# Altium PCB GND_REVB.PcbDoc
Units mm, origin at the board's own origin, x right, y up, seen from the top; angles counter-clockwise.
Board outline 37 x 43 mm, 4 copper layers (Top Layer, GND_1, GND_2, Bottom Layer), stack 1.591 mm thick; 25 components, 30 nets, 146 pads, 61 vias.
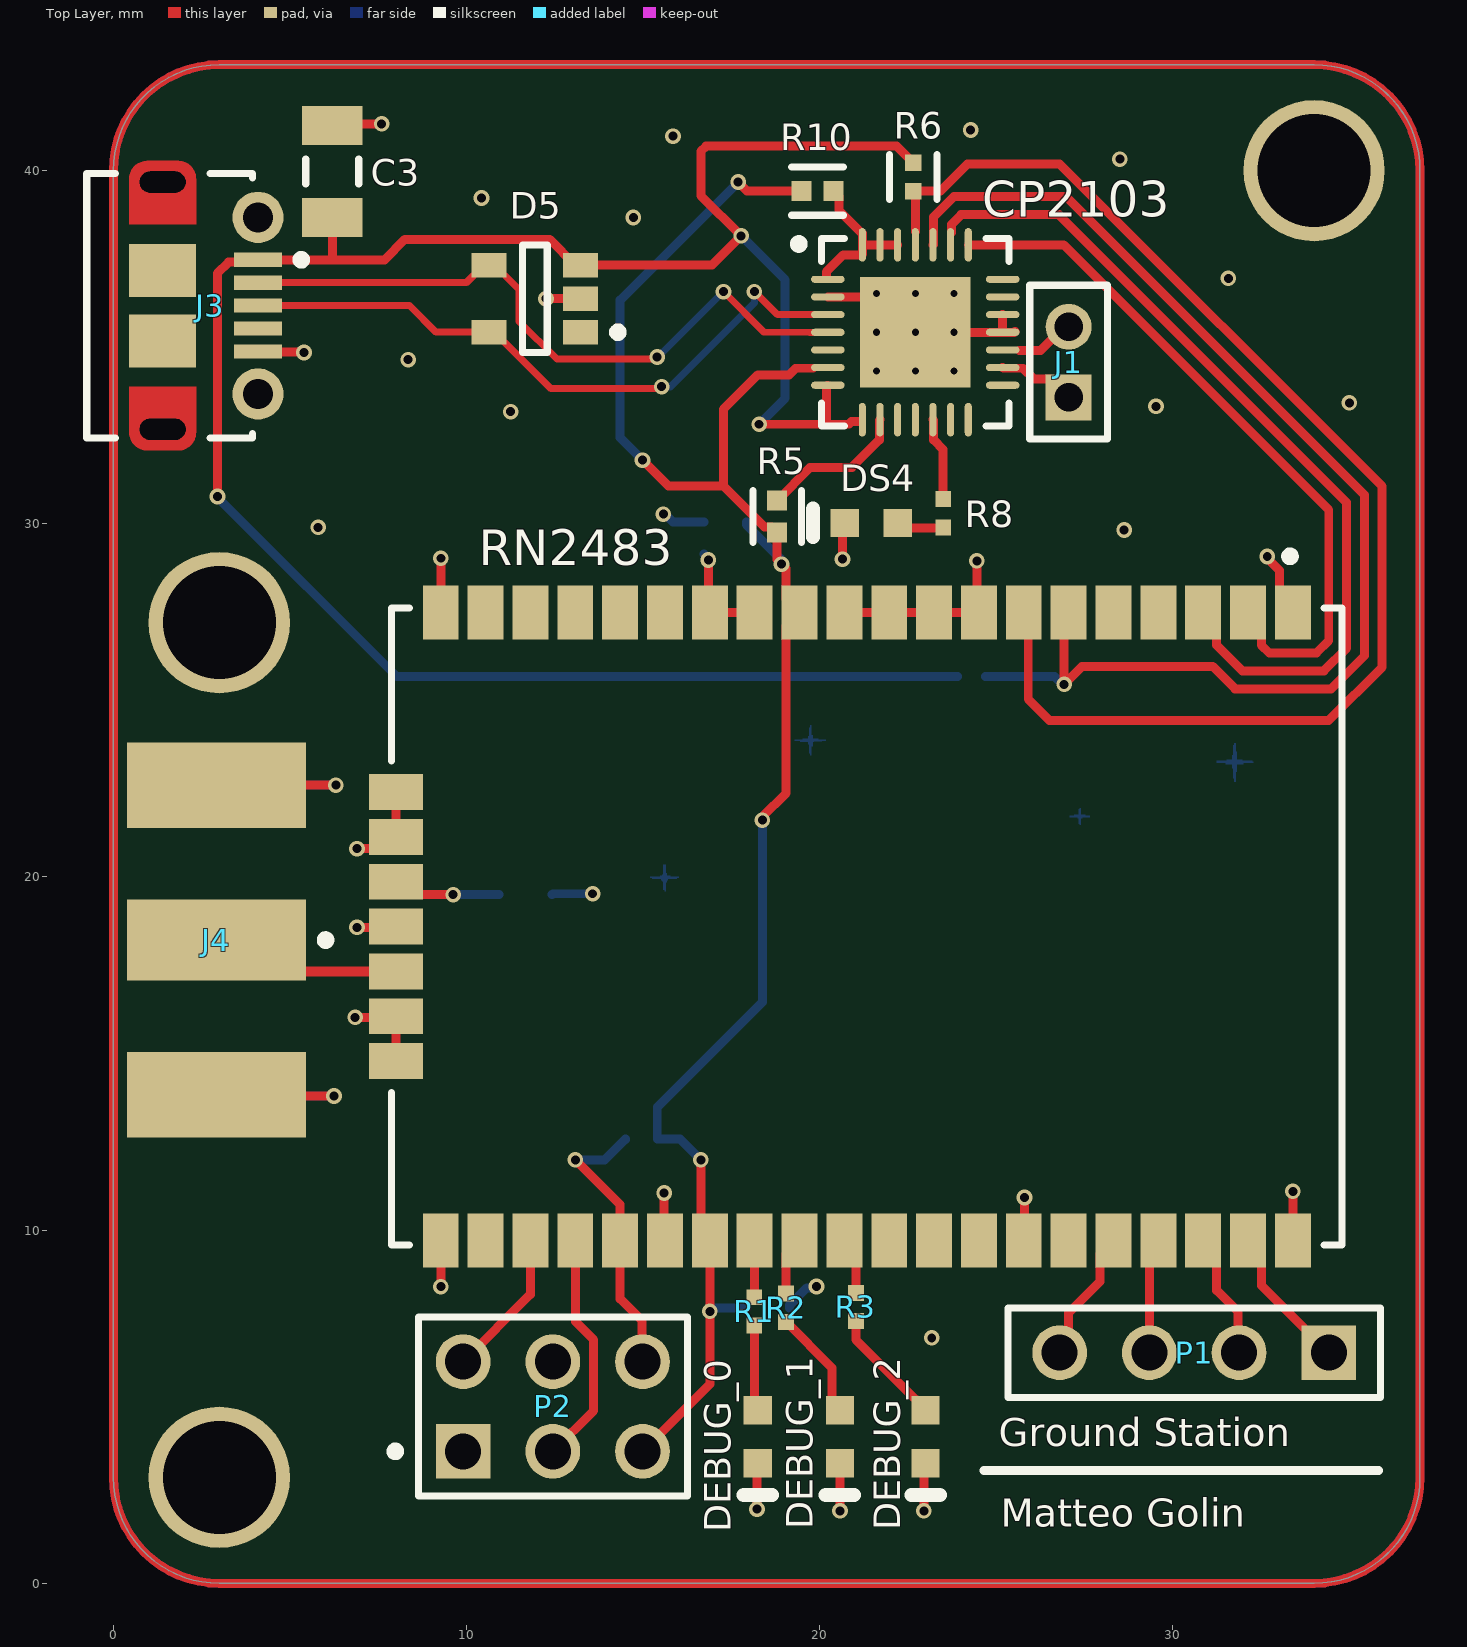
[diagram p0: Top Layer view]
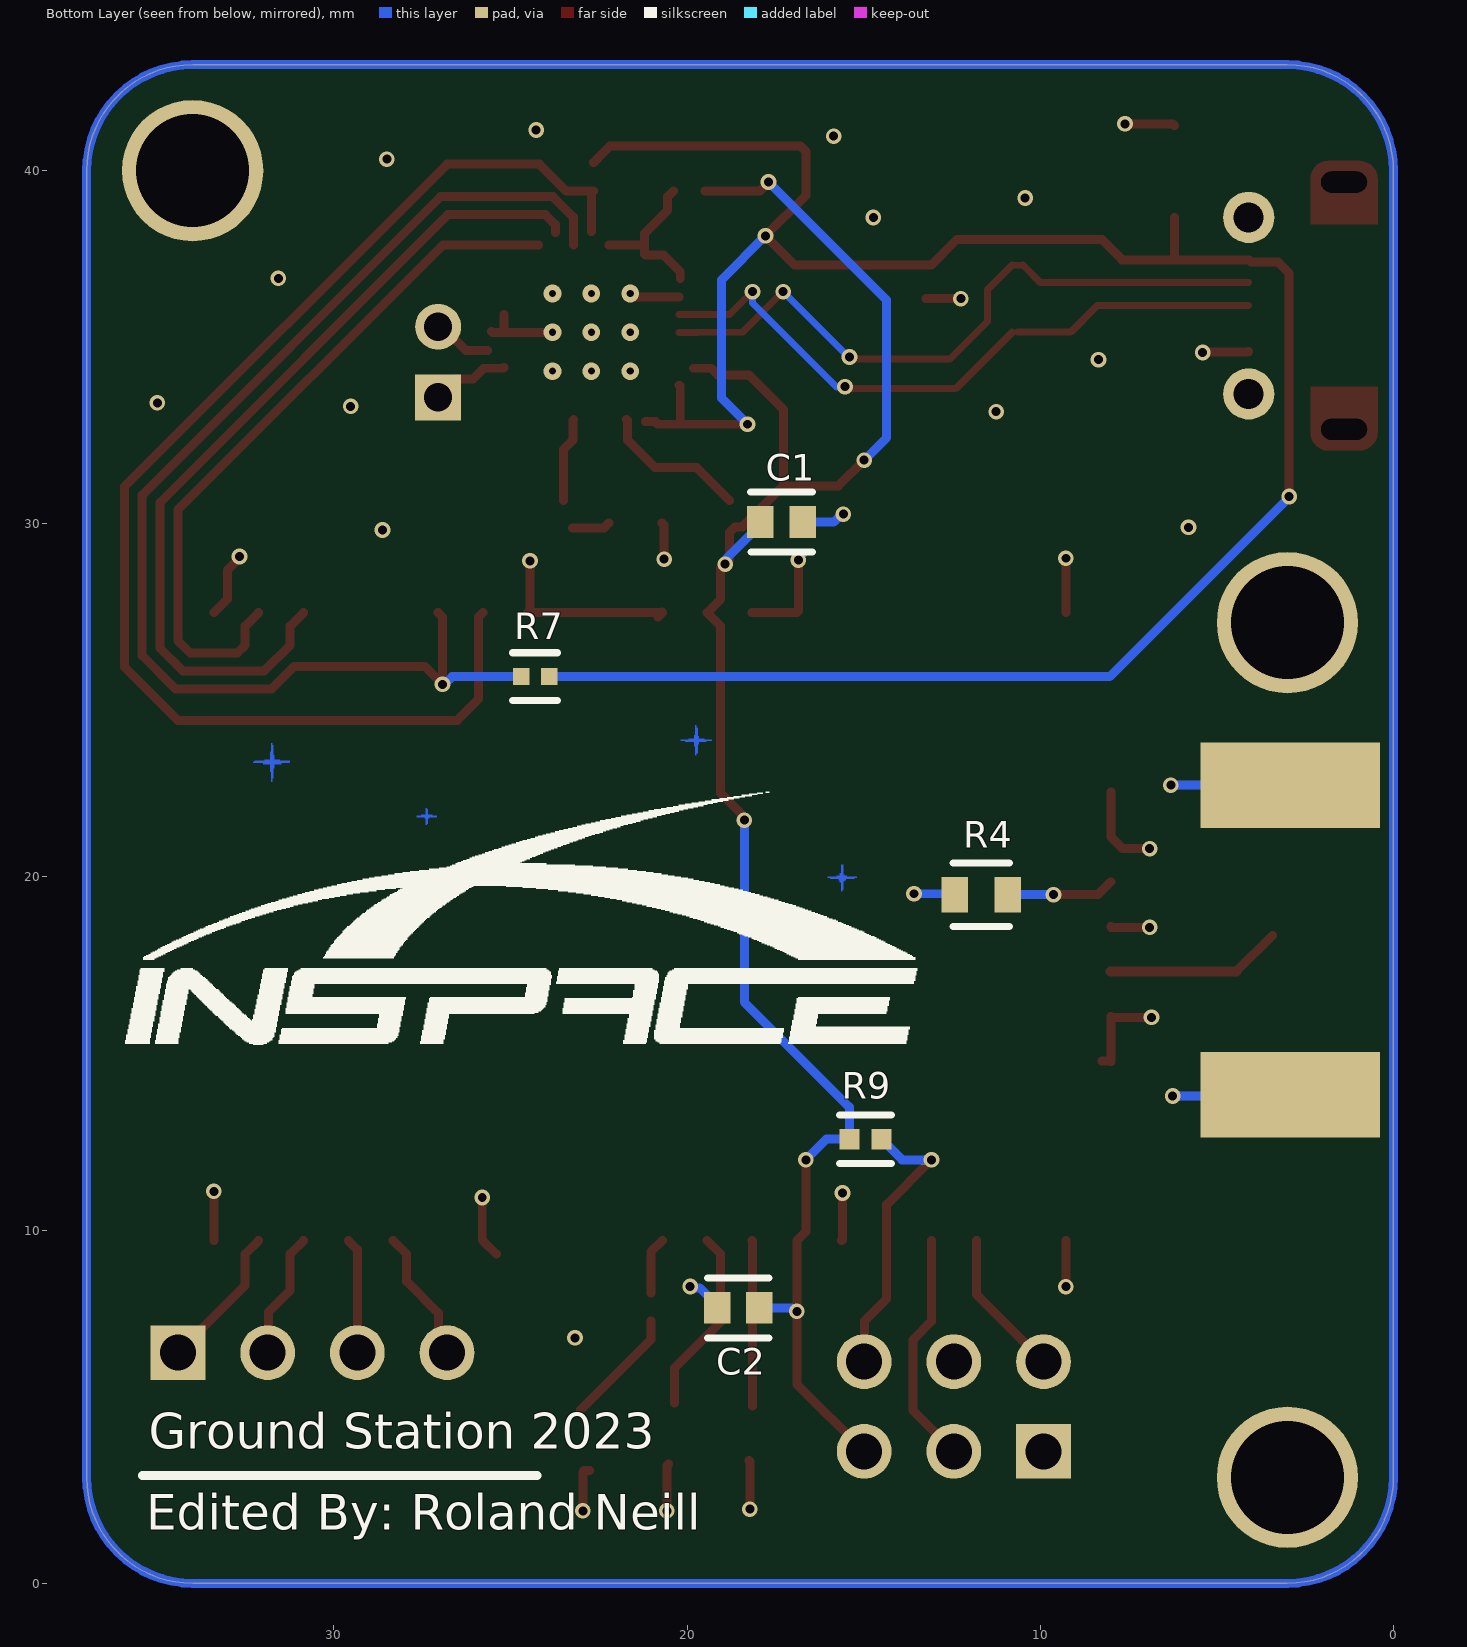
[diagram p1: Bottom Layer view, seen from below]
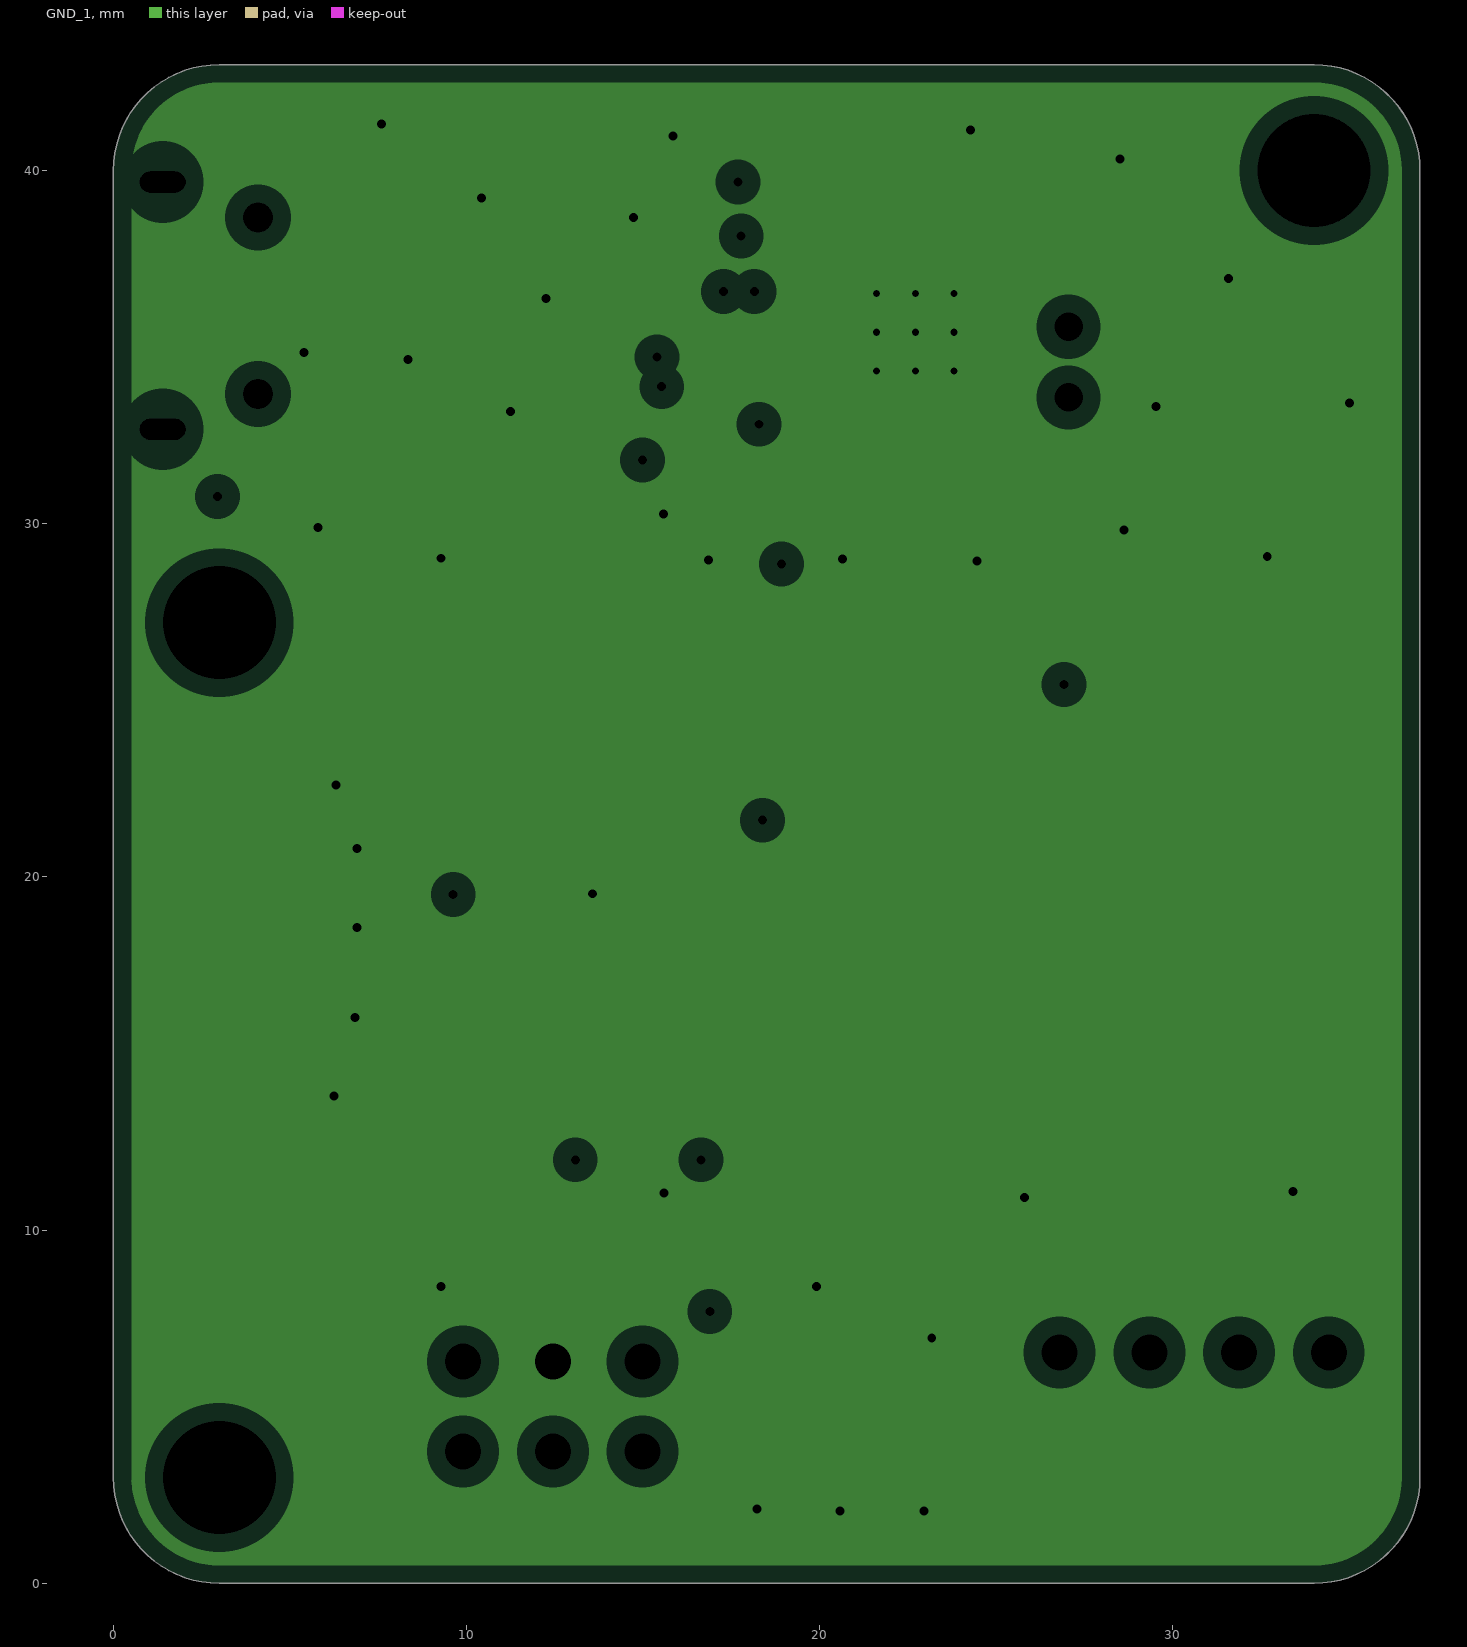
[diagram p2: GND_1, clearances drawn from the general rule]
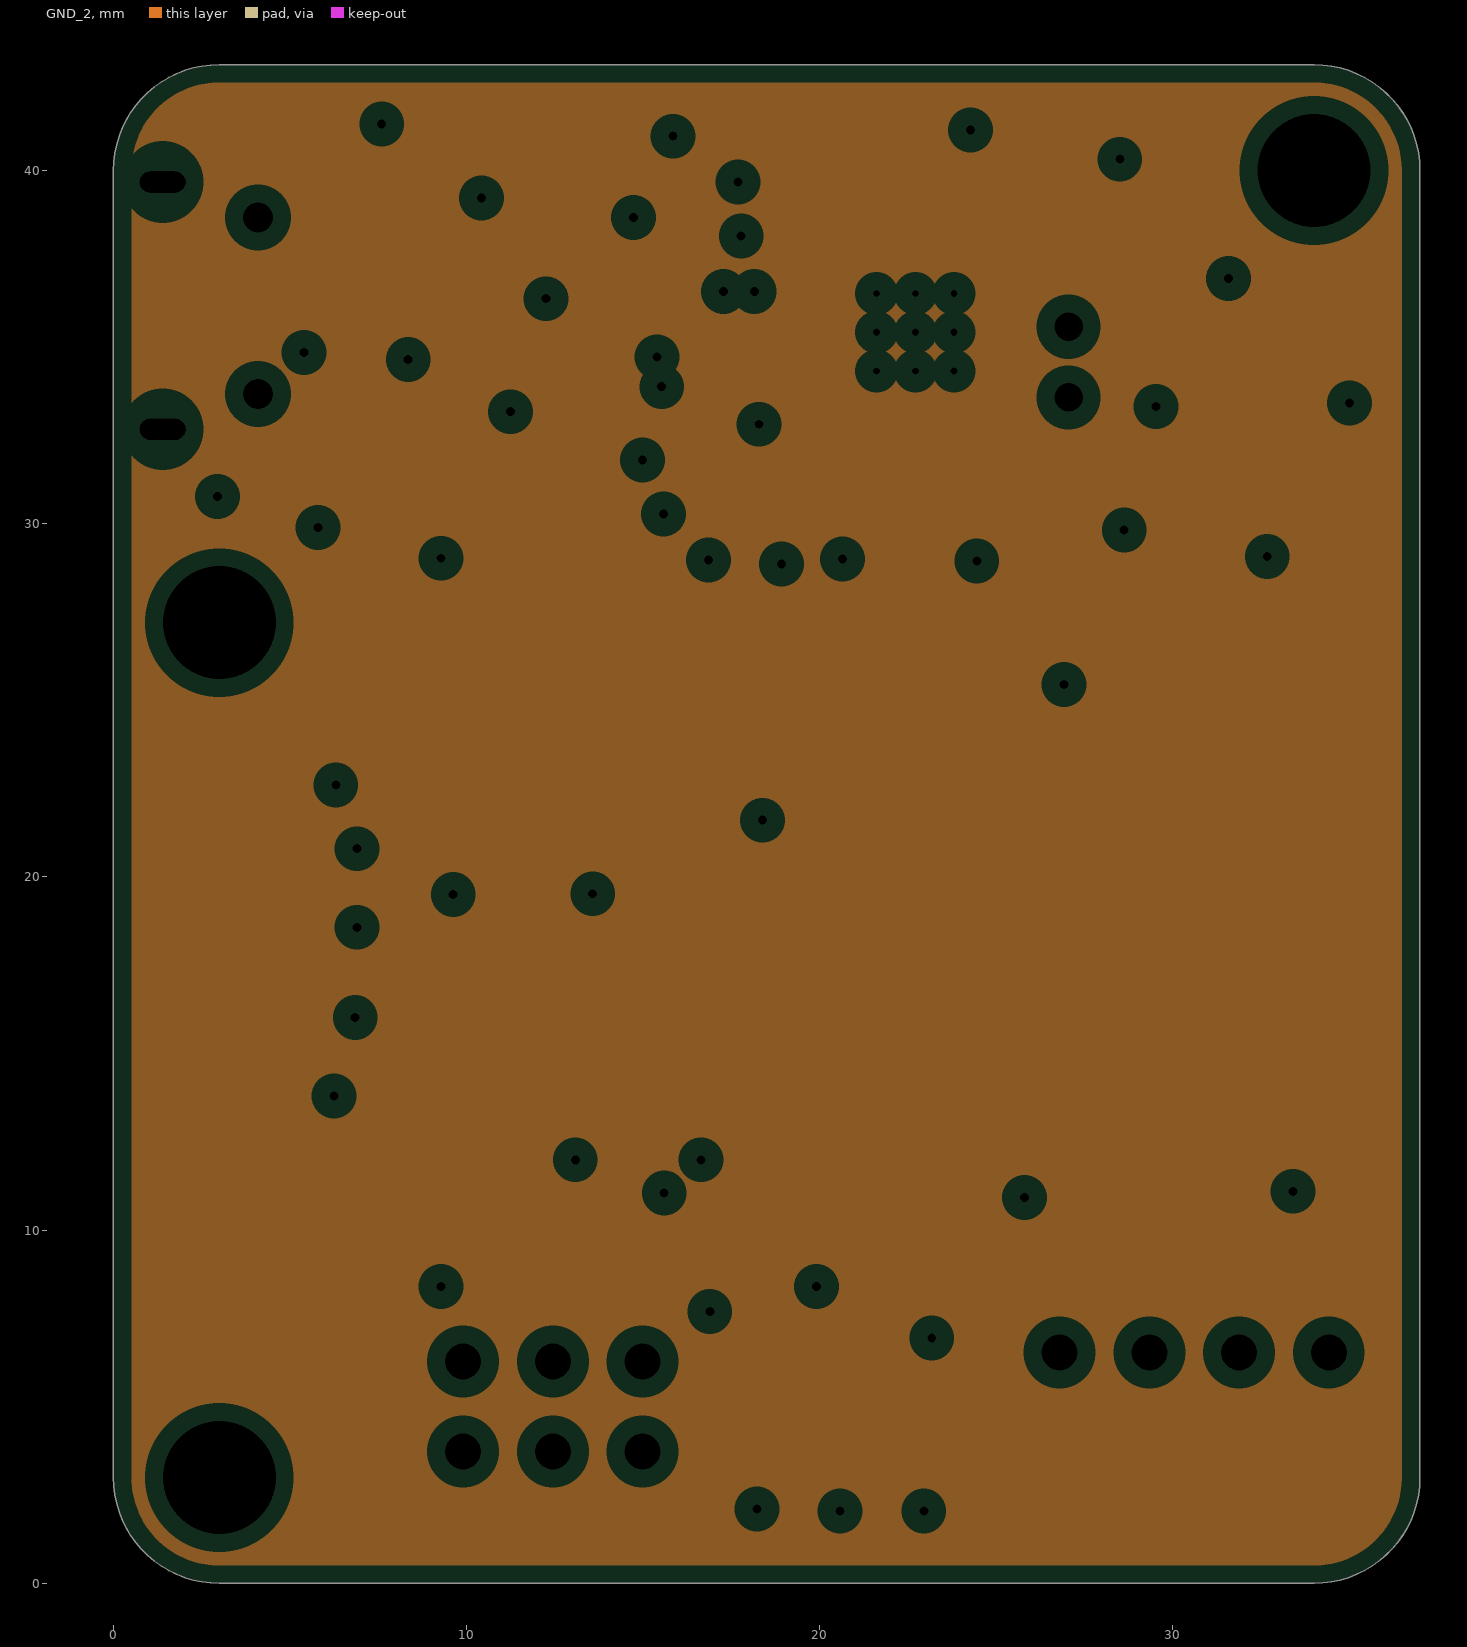
[diagram p3: GND_2, clearances drawn from the general rule]
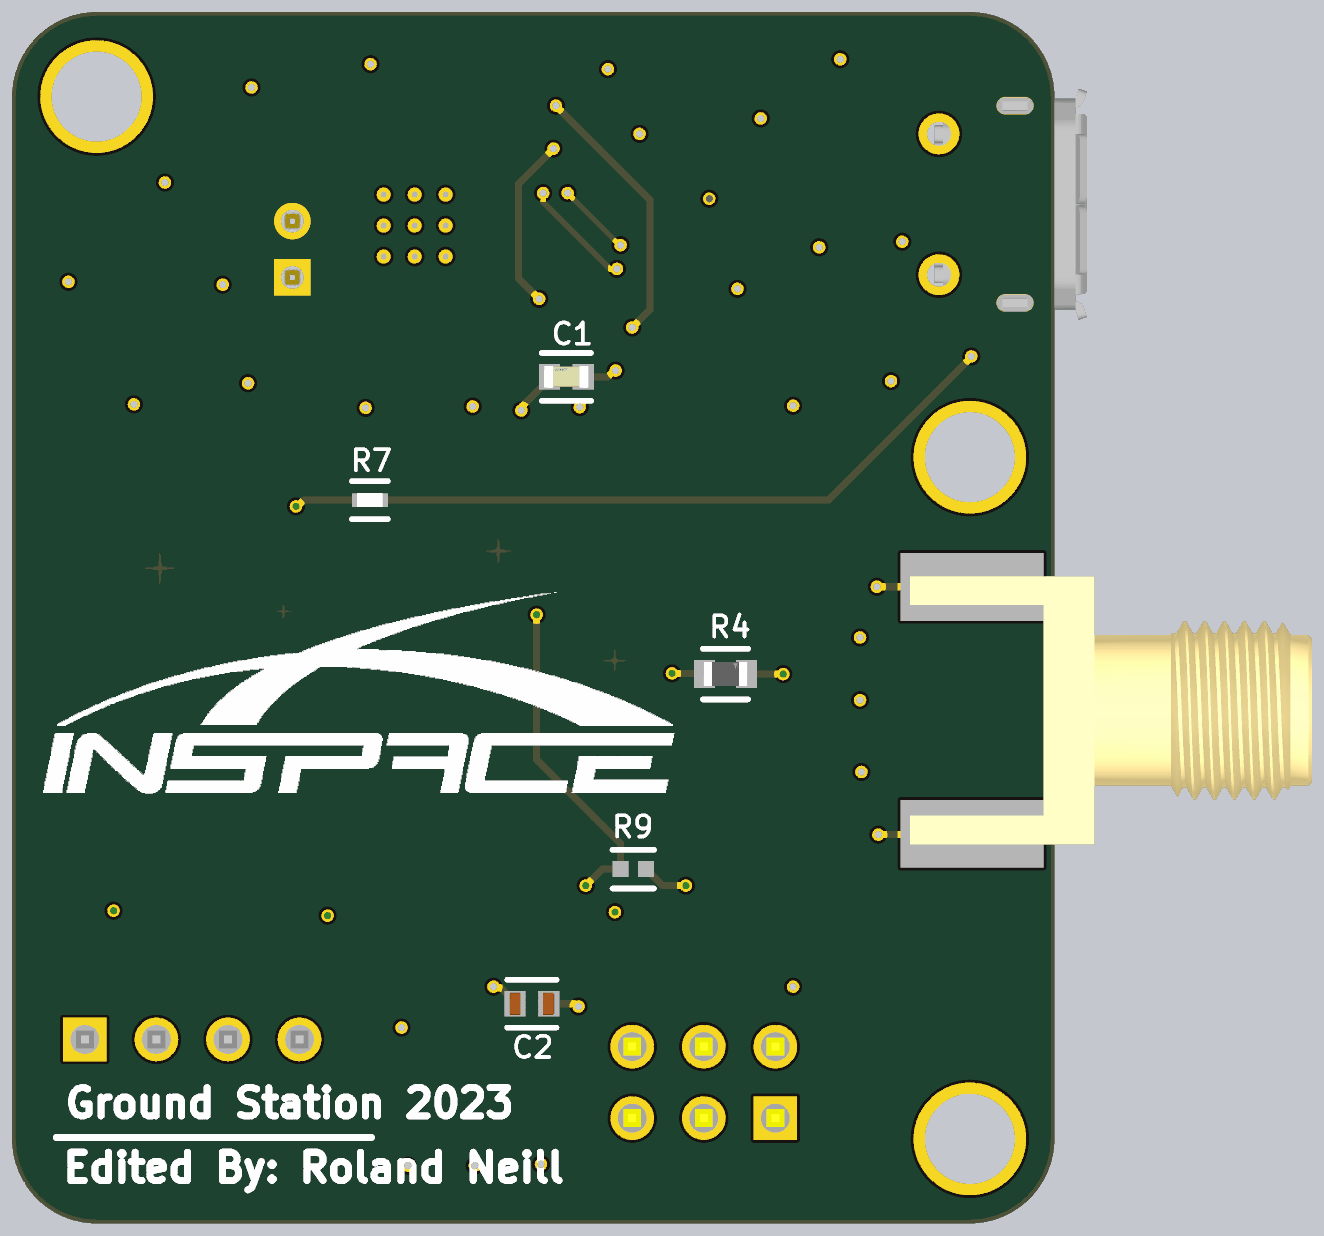
[diagram p4: 3D render of the assembled board from below, using the file's embedded part models]

## Layer stack, top to bottom
Top Solder: solder mask 0.0254, SM-002, Dk 3.8
Top Layer: signal copper 0.035
Dielectric 2: prepreg 0.2104, PP-022, Dk 4.6
GND_1: plane copper 0.0175, net GND
Dielectric 3: core 1.065, Core-025, Dk 4.6
GND_2: plane copper 0.0175
Dielectric 1: prepreg 0.2104, PP-022, Dk 4.6
Bottom Layer: signal copper 0.035
Bottom Solder: solder mask 0.0254, SM-002, Dk 3.8

## Board outline
0,3 ccw(c3,3) 3,0 34,0 ccw(c34,3) 37,3 37,40 ccw(c34,40) 34,43 3,43 ccw(c3,40) 0,40

## Design rules (kind name [scope] priority, off if disabled: settings)
Clearance [All] p1: gap=0.254 ignorepadtopadclearanceinfootprint=TRUE except(0: Arc-Hole Track-Hole SMDPad-Hole THPad-Hole Via-Hole Fill-Hole Poly-Hole Region-Hole Text-Hole; 0.127: Arc-Arc Arc-Track Track-Track SMDPad-SMDPad THPad-THPad)
DiffPairsRouting [All] p1: maxlimit=0.127 minlimit=0.127 mostfreqgap=0.127 toplayer_minwidth=0.198 toplayer_maxwidth=0.198 toplayer_prefwidth=0.198 bottomlayer_minwidth=0.198 bottomlayer_maxwidth=0.198 bottomlayer_prefwidth=0.198 impedanceprofiledriven=TRUE impedanceprofileid={2ADE05BC-6F42-4028-BEB3-FEE78A409D5E} impedanceprofilevalue=90.000000 maxuncoupledlength=12.7
PlaneClearance [All] p1: clearance=0.508
PlaneConnect [All] p1: planeconnectstyle=Direct reliefexpansion=0.508 reliefentries=4 reliefconductorwidth=0.254 reliefairgap=0.254
PolygonConnect [All] p1: connectstyle=Relief reliefconductorwidth=0.254 reliefentries=4 polygonreliefangle="90 Angle" airgapwidth=0.254
RoutingVias [All] p1: holewidth=0.254 width=0.445 viastyle="Through Hole" minholewidth=0.2 minwidth=0.4 maxholewidth=6.3 maxwidth=6.4
SolderMaskExpansion [All] p1: expansion=0.102 istentingtop=FALSE
Width [All] p1: maxlimit=2.5 minlimit=0.127 preferedwidth=0.293 minimp=50.000000 maximp=50.000000 favimp=50.000000
27 further rules are at their usual default settings.

## Classes and differential pairs
component class USB: C1 C2 C3 CP2103 D5 DS4 J1 J3 R5 R6 R7 R8 R10
component class RADIO: DEBUG_0 DEBUG_1 DEBUG_2 J4 P1 P2 R1 R3 R4 R9 RN2483
differential pair USB_D: +USB_D_P -USB_D_N

## Components (designator, comment, footprint, x,y, rotation, side; value= is the part's Value field where it differs from the comment)
C1 "C0603C104K5RACTU" FP-C0603C-CF-MFG 17.325,30.05 r180 bottom value="0.10 μF"
C2 "C0603C475K9PACTU" FP-C0603-CG-MFG 18.55,7.8 r0 bottom value=4.7uF
C3 "C1206C105K5RACTU" CAPC3216X110X50LL20T25 6.2,39.975 r270 top
CP2103 "CP2103-GM" SLAB-QFN-28-3125x3125TP_A_M 22.709,35.424 r0 top (schematic designator U2)
D5 "SP0504BAHTG" FP-SP0504BAHTG-MFG 11.938,36.375 r180 top value=30pF
DEBUG_0 "HSMG-C190" AVAG-HSMX-C190_V 18.25,4.15 r270 top (schematic designator DS0)
DEBUG_1 "HSMY-C190" AVAG-HSMX-C190_V 20.575,4.15 r270 top (schematic designator DS1)
DEBUG_2 "HSMH-C190" AVAG-HSMX-C190_V 23,4.15 r270 top (schematic designator DS2)
DS4 "HSMH-C190" AVAG-HSMX-C190_V 21.463,30.025 r180 top
J1 "M22-2510205" FP-M22-2510205-MFG 27.051,34.581 r90 top
J3 "105017-0001" USB-MICRO-B_V 2.747,36.177 r270 top
J4 "142-0701-801" CINC-142-0701-801_V 2.921,18.214 r180 top
P1 "TSW-104-08-G-S" SMTC-TSW-104-08-X-S 34.417,6.53 r180 top
P2 "TSW-103-07-G-D" SMTC-TSW-103-07-G-D_V 12.446,5.006 r0 top
R1 "CRCW0402220KFKED" RESC1005X40X25LL05T05 18.15,7.7 r90 top
R2 "CRCW0402220KFKED" RESC1005X40X25LL05T05 19.05,7.8 r90 top
R3 "CRCW0402220KFKED" RESC1005X40X25LL05T05 21.025,7.825 r90 top
R4 "CRCW060350R0FKEA" FP-CRCW0603-e3-MFG 11.675,19.5 r180 bottom
R5 "CRCW040210K0FKED" FP-CRCW0402-e3-IPC_B 18.796,30.208 r270 top
R6 "CRCW0402100KFKED" FP-CRCW0402-e3-IPC_C 22.65,39.825 r90 top
R7 "CRCW0402100KFKED" FP-CRCW0402-e3-IPC_C 24.3,25.675 r180 bottom
R8 "CRCW0402220KFKED" RESC1005X40X25LL05T05 23.5,30.3 r90 top
R9 "CRCW040210K0FKED" FP-CRCW0402-e3-IPC_B 14.95,12.575 r0 bottom
R10 "CRCW040210K0FKED" FP-CRCW0402-e3-IPC_B 19.939,39.423 r0 top
RN2483 "RN2483A-I/RM104" FP-RN2483A-I-RM104-MFG 21.336,18.595 r90 top (schematic designator U1)

## Footprints (in the part's own frame and the unit in brackets; to place one, negate y for a bottom-side part, rotate by r counter-clockwise, add the part's x,y. Pads: shape width x height; smd on the part's side, far side on the other; paste and mask are expansions set on the pad)
AVAG-HSMX-C190_V [mm] "SMD, 2-Leads, Body 1.6x0.8mm, Height 0.9mm"
  rect 0.8x0.8 smd: 1(-0.75,0) 2(0.75,0)
  silkscreen extent 1.65,-0.4 1.65,0.4, body extent -0.8,-0.4 0.8,0.4, height 0.9
CAPC3216X110X50LL20T25 [mm] "Chip Capacitor, 2-Leads, Body 3.20x1.60mm, IPC High Density"
  rect 1.1x1.7 smd: 1(-1.3,0) 2(1.3,0)
  silkscreen extent -0.35,-0.75 0.35,0.75, body extent -1.7,-0.9 1.7,0.9, height 1.1
CINC-142-0701-801_V [mil] "SMA Connector, 5-Leads, Body 14.275x9.525mm"
  rect 200x90 smd: 1(0,0)
  rect 200x95 smd: 2(0,172.5) 3(0,-172.5)
  rect 200x95 smd far side: 4(0,172.5) 5(0,-172.5)
  silkscreen extent -127,-5 -117,5, body extent -87,-187 475,188, height 171
FP-C0603-CG-MFG [mm]
  rect 0.75x0.9 smd paste+0 mask+0: 1(-0.6,0) 2(0.6,0)
  silkscreen extent -0.87,-0.85 0.87,0.85, body extent -0.8,-0.4 0.8,0.4, height 0.9
FP-C0603C-CF-MFG [mm]
  rect 0.75x0.9 smd paste+0 mask+0: 1(-0.6,0) 2(0.6,0)
  silkscreen extent -0.87,-0.85 0.88,0.85, body extent -0.8,-0.4 0.8,0.4, height 0.87
FP-CRCW0402-e3-IPC_B [mm]
  rect 0.568x0.572 smd paste+0 mask+0: 1(-0.452,0) 2(0.452,0)
  silkscreen extent -0.74,-0.69 0.74,0.69
FP-CRCW0402-e3-IPC_C [mm]
  rect 0.468x0.472 smd paste+0 mask+0: 1(-0.402,0) 2(0.402,0)
  silkscreen extent -0.64,-0.67 0.64,0.67, body extent -0.74,-0.38 0.74,0.38, height 0.25
FP-CRCW0603-e3-MFG [mm]
  rect 0.75x1 smd paste+0 mask+0: 1(-0.75,0) 2(0.75,0)
  silkscreen extent -0.8,-0.9 0.8,0.9, body extent -0.77,-0.43 0.77,0.43, height 0.5
FP-M22-2510205-MFG [mm]
  rect 1.3x1.3 hole 0.8 paste-1000 mask+0: 1(-1,0)
  round 1.3 hole 0.8 paste-1000 mask+0: 2(1,0)
  silkscreen extent -2.18,-1.1 2.18,1.1, body extent -2.27,-1.2 2.27,1.2, height 0.25
FP-RN2483A-I-RM104-MFG [mil]
  rect 60x40 smd paste+0 mask+0: 1(350,-475) 2(350,-425) 3(350,-375) 4(350,-325) 5(350,-275) 6(350,-225) 7(350,-175) 8(350,-125) 9(350,-75) 10(350,-25) 11(350,25) 12(350,75) 13(350,125) 14(350,175) 15(350,225) 16(350,275) 17(350,325) 18(350,375) 19(350,425) 20(350,475) 28(-350,475) 29(-350,425) 30(-350,375) 31(-350,325) 32(-350,275) 33(-350,225) 34(-350,175) 35(-350,125) 36(-350,75) 37(-350,25) 38(-350,-25) 39(-350,-75) 40(-350,-125) 41(-350,-175) 42(-350,-225) 43(-350,-275) 44(-350,-325) 45(-350,-375) 46(-350,-425) 47(-350,-475)
  rect 40x60 smd paste+0 mask+0: 21(150,525) 22(100,525) 23(50,525) 24(0,525) 25(-50,525) 26(-100,525) 27(-150,525)
  silkscreen extent -355,-530 418,530, body extent -384,-534 384,559, height 10
FP-SP0504BAHTG-MFG [mm]
  rect 0.99x0.69 smd paste+0 mask+0: 1(-1.295,0.95) 2(-1.295,0) 3(-1.295,-0.95) 4(1.295,-0.95) 5(1.295,0.95)
  silkscreen extent -2.48,-1.53 0.35,1.53, body extent -1.89,-1.63 1.89,1.63, height 0.25
RESC1005X40X25LL05T05 [mm] "Chip Resistor, 2-Leads, Body 1.00x0.50mm, IPC High Density"
  rect 0.45x0.45 smd: 1(-0.4,0) 2(0.4,0)
  body extent -0.53,-0.27 0.53,0.28, height 0.4
SLAB-QFN-28-3125x3125TP_A_M [mm] "QFN, 28-Leads, Body 5x5mm, Pitch 0.5mm, Thermal Pad 3.13x3.13mm, IPC Low Density"
  oval 0.95x0.2 smd: 1(-2.475,1.5) 2(-2.475,1) 3(-2.475,0.5) 4(-2.475,0) 5(-2.475,-0.5) 6(-2.475,-1) 7(-2.475,-1.5) 15(2.475,-1.5) 16(2.475,-1) 17(2.475,-0.5) 18(2.475,0) 19(2.475,0.5) 20(2.475,1) 21(2.475,1.5)
  oval 0.2x0.95 smd: 8(-1.5,-2.475) 9(-1,-2.475) 10(-0.5,-2.475) 11(0,-2.475) 12(0.5,-2.475) 13(1,-2.475) 14(1.5,-2.475) 22(1.5,2.475) 23(1,2.475) 24(0.5,2.475) 25(0,2.475) 26(-0.5,2.475) 27(-1,2.475) 28(-1.5,2.475)
  rect 3.13x3.13 smd: 29(0,0)
  silkscreen extent -3.42,-2.65 2.65,2.65, body extent -2.5,-2.5 2.5,2.5, height 1
SMTC-TSW-103-07-G-D_V [mm] "THD, 6-Leads, Body 7.62x5.08mm, Pitch 2.54mm"
  rect 1.55x1.55 hole 1.02: 1(-2.54,-1.27)
  round 1.55 hole 1.02: 2(-2.54,1.27) 3(0,-1.27) 4(0,1.27) 5(2.54,-1.27) 6(2.54,1.27)
  silkscreen extent -4.58,-2.54 3.81,2.54, body extent -3.81,-2.54 3.81,2.54, height 8.38
SMTC-TSW-104-08-X-S [mm] ".025 SQ Post Terminal Strip Assembly, 1x4 Pins, Vertical, 2.54mm Pitch, Male"
  rect 1.55x1.55 hole 1.02: 1(0,0)
  round 1.55 hole 1.02: 2(2.54,0) 3(5.08,0) 4(7.62,0)
  silkscreen extent -1.46,-1.27 9.08,1.27, body extent -1.27,-1.27 8.89,1.27, height 8.38
USB-MICRO-B_V [mm] "USB, MICRO B, Body 7.491x4.695 mm, Pitch 0.65 mm"
  rect 0.4x1.35 smd: 1(-1.3,1.35) 2(-0.65,1.35) 3(0,1.35) 4(0.65,1.35) 5(1.3,1.35)
  round 1.45 hole 0.85: 6(-2.5,1.35) 7(2.5,1.35)
  rrect50% 0x0 hole 0.6 slot 1.3 at 90 deg: 8(-3.5,-1.35) 11(3.5,-1.35)
  rect 1.5x1.9 smd: 9(-1,-1.35) 10(1,-1.35)
  Top Layer circle w0.5: c3.6,-0.9 r0.25
  Top Layer circle w0.5: c3.6,-1.8 r0.25
  Top Layer circle w0.5: c-3.6,-0.9 r0.25
  Top Layer circle w0.5: c-3.6,-1.8 r0.25
  Top Layer region: -2.3,-2.3 -2.3,-0.4 -3.6,-0.4 -3.6,-2.3
  Top Layer region: 2.3,-0.4 2.3,-2.3 3.6,-2.3 3.6,-0.4
  Top Layer region: 3.6,-0.9 3.6,-1.8 4.1,-1.8 4.1,-0.9
  Top Layer region: -3.6,-1.8 -3.6,-0.9 -4.1,-0.9 -4.1,-1.8
  silkscreen extent -3.75,-3.5 3.75,2.7, body extent -4.1,-3.9 4.1,1.5, height 2.67

## Part data
C1: library part CMP-2006-03061-2, "CAP CER 0.1UF 50V X7R 0603", Capacitance="0.10 μF", Manufacturer=KEMET, Package=C0603C-CF, Temperature="-55°C to +125°C", Temperature Characteristic=X7R, Temperature Coefficient=30ppm/°C, Temperature Range High=+125°C, Temperature Range Low=-55°C, Tolerance=0.1, Voltage Rating="50 V", Automotive=Yes, Automotive Grade="Grade 1", Category=Cap, ComponentLink2Description=Datasheet, ComponentLink2URL=https://api.kemet.com/component-edge/download/datasheet/C0603C100J5GACAUTO.pdf, Device Class L1="Passive Components", Device Class L2=Capacitors, Device Class L3="Ceramic Capacitors", Digikey Description="CAP CER 0.1UF 50V X7R 0603", Height=0.87mm, Lead Free=Yes, Manufacturer Part Number=C0603C104K5RACTU, Material=Ceramic, Octopart=https://octopart.com/c0603c104k5ractu-kemet-139244, RoHS=TRUE
C2: library part CMP-2006-02256-2, "CAP CER 4.7UF 6.3V X5R 0603", Capacitance=4.7uF, Manufacturer=Kemet, Package=C0603-CG, Temperature="-55°C to +85°C", Temperature Characteristic=X5R, Temperature Coefficient=15%, Temperature Range High=+85°C, Temperature Range Low=-55°C, Tolerance=10%, Voltage Rating=6.3V, Automotive=No, Category=Cap, ComponentLink2Description=Datasheet, ComponentLink2URL=https://content.kemet.com/datasheets/KEM_C1006_X5R_SMD.pdf, Device Class L1="Passive Components", Device Class L2=Capacitors, Device Class L3="Ceramic Capacitors", Digikey Description="CAP CER 4.7UF 6.3V X5R 0603", Height=0.9mm, Ipc Land Pattern Name=CAPC16080X80, Lead Free=Yes, Manufacturer Part Number=C0603C475K9PACTU, Material=Ceramic, Mouser Description="Multilayer Ceramic Capacitors MLCC - SMD/SMT 6.3volts 4.7uF X5R 10%", Octopart=https://octopart.com/c0603c475k9pactu-kemet-104242, RoHS=TRUE
C3: library part CMP-2000-06011-1, "Chip Capacitor, 1 uF, +/- 10%, 50 V, -55 to 125 degC, 1206 (3216 Metric), RoHS, Tape and Reel", Capacitance=1uF, Capacitance - nF=1000nF, Case Code - in=1206, Case Code - mm=3216, Case Height=1mm, Case Length=3.2mm, Case Width=1.6mm, Dielectric=X7R, Manufacturer=Kemet, Maximum Operating Temperature=+125C, Minimum Operating Temperature=-55C, Operating Temperature Range=-55Cto+125C, Package / Case=1206(3216metric), Package Description="2-Pin Surface Mount Device, Body 3.2 x 1.6 mm", Temperature Coefficient / Code=+/-15%, Tolerance=10%, Voltage Rating=50V, Brand=Kemet, Class=Class1, Datasheet URL=http://www.kemet.com/docfinder?Partnumber=C1206C105K5RACTU, Datasheet Version=02/2016, Dimensions=1.6mmWx3.2mmLx1mmH, Factory Pack Quantity=2500, Manufacturer URL=http://www.kemet.com/, Mounting Technology=SurfaceMount, Package Reference=1206, Packaging=Reel, Product=GeneralTypeMLCCs, Product Category=MultilayerCeramicCapacitorsMLCC-SMD/SMT, RoHS=Details, Series=C1206C, Termination Style=SMD/SMT, Type=SMDMLCCX7R6.3-250VDCCommericalGrade, Voltage Rating DC=50V
CP2103: library part CMP-0511-00006-1, "Single-Chip USB to UART Bridge, 1024 Bytes EEPROM, -40 to 85 degC, 28-pin QFN, Tube", Manufacturer="Silicon Labs", ComponentLink1Description="Manufacturer URL", ComponentLink1URL=http://www.silabs.com/, ComponentLink2Description=Datasheet, ComponentLink2URL=http://www.silabs.com/Support%20Documents/TechnicalDocs/CP2103.pdf, ComponentLink3Description="Package Specification", ComponentLink3URL=http://www.silabs.com/Support%20Documents/TechnicalDocs/C8051F35x.pdf, DatasheetVersion="Rev. 1.0", EEPROM="1024 Bytes", Internal Oscillator=TRUE, Mounting Technology="Surface Mount", PackageDescription="28-Pin Quad-Flat No-Leads Package, Body 5 x 5 mm, Pitch 0.5 mm", PackageReference=QFN-28, PartNumber=CP2103-GM, Sub-Family="USB Bridges"
D5: library part CMP-08607-000010-1, "TVS DIODE 5.5V 8.5V SOT23-5", Capacitance=30pF, Clamping Voltage=8.5V, Manufacturer=Littelfuse, Reverse Standoff Voltage=5.5V, Temperature="-40°C to +125°C", Temperature Range High=+125°C, Temperature Range Low=-40°C, Automotive=No, Category=Diode, ComponentLink2Description=Datasheet, ComponentLink2URL=https://www.littelfuse.com/~/media/electronics/datasheets/tvs_diode_arrays/littelfuse_tvs_diode_array_sp05_datasheet.pdf.pdf, Device Class L1="Circuit Protection", Device Class L2="TVS Diodes", Device Class L3=unset, Digikey Description="TVS DIODE 5.5V 8.5V SOT23-5", Direction=Unidirectional, Height=1.45mm, Lead Free=Yes, Manufacturer Part Number=SP0504BAHTG, Mouser Description="TVS Diodes / ESD Suppressors SP0504BAHTG", Number Of Channels=4, Octopart=https://octopart.com/sp0504bahtg-littelfuse-587259, Package=SP0504BAHTG, RoHS=TRUE, Standoff Height=0mm
DEBUG_0: library part CMP-1744-00002-1, "Chip LED, Green, 2.2 V, -40 to 85 degC, 2-Pin SMD, RoHS, Tape and Reel", Case\Package=SOIC, Clock Frequency="100 KHz", Frequency="400 KHz", Max Operating Temperature="85 degC", Max Supply Voltage="5.5 V", Min Operating Temperature="-40 degC", Min Supply Voltage="1.7 V", Nominal Supply Current="2 mA", Package Quantity=3000, Access Time="3500 ns", ComponentLink1Description="Manufacturer URL", ComponentLink1URL=http://www.avagotech.com/, ComponentLink2Description=Datasheet, ComponentLink2URL=http://docs.avagotech.com/docs/AV02-0551EN, ComponentLink3Description="Package Specification", ComponentLink3URL=http://www.fairchildsemi.com/dwg/MA/MA03D.pdf, DatasheetVersion=Mar-12, Density="32 kb", Height="1.5 mm", Interface=Serial, Length="5 mm", Max Clock Frequency="100 KHz", Mount="Surface Mount", PackageDescription="2-Pin Surface Mount Device, Body 1.6 x 0.8 mm, Height 0.9 mm", PackageReference=HSMX-C190, Packaging="Tape and Reel", Pins=8, Radiation Hardening=No, REACH SVHC="No SVHC", RoHSCompliant=true, Width="4 mm"
DEBUG_1: library part CMP-1744-00003-1, "LED Uni-Color Yellow, 65 mW, 20 mA, -40 to 85 degC, 2-Pin SMD, RoHS, Tape and Reel", Case Code (Imperial)=0603, Case Code (Metric)=1608, Max Operating Temperature="155 degC", Min Operating Temperature="-55 degC", Package Quantity=5000, Power Rating="100 mW", Resistance="390 Ohm", Tolerance=1%, Voltage Rating="50 V", Case\Package=0603, ComponentLink1Description="Manufacturer URL", ComponentLink1URL=http://www.avagotech.com/, ComponentLink2Description=Datasheet, ComponentLink2URL=http://docs.avagotech.com/docs/AV02-0551EN, ComponentLink3Description="Package Specification", ComponentLink3URL=http://www.fairchildsemi.com/dwg/MA/MA03D.pdf, DatasheetVersion=Mar-12, Height="0.45 mm", Length="1.6 mm", Mount="Surface Mount", PackageDescription="2-Pin Surface Mount Device, Body 1.6 x 0.8 mm, Height 0.9 mm", PackageReference=HSMX-C190, Packaging="Tape and Reel", Pins=2, REACH SVHC="No SVHC", RoHSCompliant=true, Voltage Rating (DC)="50 V", Width="0.8 mm"
DEBUG_2 DS4: library part CMP-1744-00004-1, "LED Uni-Color Red, 65 mW, 20 mA, -40 to 85 degC, 2-Pin SMD, RoHS, Tape and Reel", Current Rating="1 A", Max Operating Temperature="85 degC", Min Operating Temperature="-30 degC", Package Quantity=2000, ComponentLink1Description="Manufacturer URL", ComponentLink1URL=http://www.avagotech.com/, ComponentLink2Description=Datasheet, ComponentLink2URL=http://docs.avagotech.com/docs/AV02-0551EN, ComponentLink3Description="Package Specification", ComponentLink3URL=http://www.fairchildsemi.com/dwg/MA/MA03D.pdf, Connector Type=USB, Contact Material=Copper, Contact Plating=Gold, DatasheetVersion=Mar-12, Gender=Male, Height="2.8 mm", Lead Pitch="0.65 mm", Length="7.5 mm", Mount="Surface Mount", PackageDescription="2-Pin Surface Mount Device, Body 1.6 x 0.8 mm, Height 0.9 mm", PackageReference=HSMX-C190, Packaging="Tape and Reel", Pins=5, REACH SVHC="No SVHC", RoHSCompliant=true, Width="5.6 mm"
J1: library part CMP-15831-000005-1, "CONN HEADER VERT 2POS 2MM", Current Rating=2A, Manufacturer=Harwin, Package=0, Temperature="-40°C to +105°C", Temperature Range High=+105°C, Temperature Range Low=-40°C, Automotive=No, Category=Conn, ComponentLink2Description=Datasheet, ComponentLink2URL=https://cdn.harwin.com/pdfs/C018XX_M22_Series_Connectors.pdf, Conn Gender=Male, Conn Orientation=Vertical, Contact Material=Gold,Nickel, Device Class L1=Connectors, Device Class L2="Headers and Wire Housings", Device Class L3=unset, Digikey Description="CONN HEADER VERT 2POS 2MM", Footprint Url=https://cdn.harwin.com/pdfs/M22-251.pdf, Height=5.45mm, Lead Free=Yes, Manufacturer Part Number=M22-2510205, Mouser Description="Headers & Wire Housings 2 PIN SIL VERTICAL GOLD PIN HEADER", Number Of Contacts=2, Number Of Rows=1, Octopart=https://octopart.com/m22-2510205-harwin-2538221, Pitch=2mm, RoHS=TRUE
J3: library part CMP-2000-05827-1, "Micro-USB B Receptacle, Right Angle, Bottom Mount, Surface Mount, with Solder Tabs, -30 to 85 degC, 5-Pin USB, RoHS, Tape and Reel", Manufacturer=Molex, Package Description="5-Leads USB, Micro B, Body 7.5 x 5 mm, Pitch 0.65 mm", Package Reference=MICRO-B, Package Version="Rev. F, 12/2012", Standard Package=1, Voltage - Max=30V, 3D Model=105017-0001.stp, Catalog Drawings=1050170001, Category=Connectors,Interconnects, Circuits=5, Connector Type=USB-microB, Datasheet URL=http://www.molex.com/elqNow/elqRedir.htm?ref=http://www.molex.com/webdocs/datasheets/pdf/en-us/1050170001_IO_CONNECTORS.pdf, Datasheet Version=03/2016, Family=USB,DVI,HDMIConnectors, Featured Product=Micro-USBConnectorsUSBConnectors, Features=Shielded,SolderRetention, Gender=Receptacle, Ingress Protection=-, Manufacturer URL=http://www.molex.com/, Mating Products=WM17145-ND-CABLEMICROUSBBTOSTDA1.0MWM17147-ND-CABLEMICROUSBBTOSTDA2.0MWM17146-ND-CABLEMICROUSBBTOSTDA1.5M, Mounting Technology=SurfaceMount, Mounting Type=BoardCutout,SurfaceMount,RightAngle, Number Of Contacts=5, Online Catalog=Molex-MicroUSB, Other Names=WM1399DKR, Package URL=http://www.molex.com/pdm_docs/sd/1050170001_sd.pdf, Packaging=Digi-Reel®, PCN Assembly/Origin=ResinSupplier21/Oct/2015, RoHS Information=1050170001CertofCompliance, Series=-, Specifications=-
J4: library part CMP-2000-05490-1, "SMA End Launch Jack Receptacle, 50 Ohm, 0 to 18 GHz, -65 to 165 degC, 5-Pin SMD, RoHS, Bulk", Manufacturer=EmersonConnectivitySolutions, Maximum Frequency=18GHz, Operating Temperature Range=-65Cto+165C, Package Description="5-Pin Surface Mount Device, Body 14.275 x 9.525 mm", Body Material=Brass, Body Style=Straight, Brand=Johnson/EmersonConnectivitySolutions, Connector Type=JackPCB, Contact Plating=Gold, Datasheet URL=https://belfuse.com/resources/Johnson/productinformation/pi-142-0701-801.pdf, Datasheet Version=12/2014, Factory Pack Quantity=5, Gender=Jack(Female), Impedance=50Ohms, Manufacturer URL=http://www.cinch.com/, Mounting Technology=SurfaceMount, Orientation=Straight, Package Reference=142-0701-801, Package URL=https://belfuse.com/resources/Johnson/drawings/dr-1420701801.pdf, Product=Connectors, Product Category=RFConnectors/CoaxialConnectors, RF Series=SMA, RoHS=Details, Series=SMA, Termination Style=Solder
P1: library part CMP-1024-00357-1, "0.025\" SQ Post Header, Through-hole, Vertical, -55 to 125 degC, 2.54 mm Pitch, 4-Pin, Male, RoHS", Manufacturer=Samtec, Temperature Range="-55 to 125 degC", ComponentLink1Description="Manufacturer URL", ComponentLink1URL=http://www.samtec.com, ComponentLink2Description=Datasheet, ComponentLink2URL=http://www.samtec.com/documents/webfiles/pdf/TSW_TH.PDF, ComponentLink3Description="Package Specification", ComponentLink3URL=http://www.samtec.com/documents/webfiles/cpdf/TSW-XXX-XX-XXX-X-XX-XXX-MKT.pdf, DatasheetVersion=F-214, Mounting Technology=Through-hole, Orientation=Vertical, PackageDescription=".025[0.64] SQ. Post Terminal Strip Assembly", PackageReference=TSW-104-08-X-S, PackageVersion="DM, 8/1988", PartNumber=TSW-104-08-G-S, Pitch="2.54 mm", RoHS=True
P2: library part CMP-2000-07329-1, "Through Hole Header, Pitch 2.54 mm, 2 x 3 Position, Height 8.58 mm, Tail Length 2.54 mm, -55 to 125 degC, RoHS, Bulk", Color=Black, Manufacturer=Samtec-Inc., Package Description="Through Hole Header, Pitch 2.54 mm, 2 x 3 Position, Height 8.58 mm, Tail Length 2.54 mm", Category=Connectors,Interconnects, Connector Type=Header,Unshrouded, Contact Finish=Gold, Contact Finish Thickness=10µin(0.25µm), Contact Mating Length="0.230\"(5.84mm)", Contact Type=MalePin, Datasheet URL=http://suddendocs.samtec.com/catalog_english/tsw_th.pdf, Datasheet Version=12/2015, Family=RectangularConnectors-Headers,MalePins, Fastening Type=-, Features=-, Manufacturer URL=http://www.samtec.com/, Mounting Technology=ThroughHole, Mounting Type=ThroughHole, Number of Positions=6, Number of Positions Loaded=All, Number Of Rows=2, Package Reference=TSW-103-07-G-D, Package URL=http://suddendocs.samtec.com/prints/tsw-xxx-xx-xxx-x-xx-xxx-mkt.pdf, Packaging=Bulk, Pitch="0.100\"(2.54mm)", Row Spacing="0.100\"(2.54mm)", Series=TSW, Termination=Solder
R1 R2 R3 R8: library part CMP-2002-08370-1, Manufacturer="Vishay Dale", Part Number=CRCW0402220KFKED
R4: library part CMP-2000-03436-2, "RES Thick Film, 50Ω, 1%, 0.1W, 100ppm/°C, 0603", Case Code (Imperial)=0603, Case Code (Metric)=1608, Max Operating Temperature=155°C, Min Operating Temperature=-55°C, Package Quantity=5000, Power Rating=100mW, Resistance=50R, Temperature Coefficient=100ppm/°C, Tolerance=1%, Voltage Rating=75V, Case/Package=0603, Composition="Thick Film", Contact Plating=Tin, Depth=0.85mm, Height=0.45mm, Lead Free="Lead Free", Length=1.55mm, Military Standard=Not, Mount="Surface Mount", Number of Pins=2, Packaging="Tape and Reel", Radiation Hardening=No, REACH SVHC="No SVHC", Termination=SMD/SMT, Voltage Rating (DC)=75V, Weight=7.1E-05oz, Width=0.85mm
R5 R9 R10: library part CMP-2002-08135-2, "RES SMD 10K OHM 1% 1/16W 0402", Case Code (Imperial)=0402, Case Code (Metric)=1005, Max Operating Temperature=155°C, Max Power Dissipation=63mW, Min Operating Temperature=-55°C, Package Quantity=10, Resistance=10kR, Temperature Coefficient=100ppm/°C, Tolerance=1%, Voltage Rating=50V, Case/Package=0402, Composition="Thick Film", Contact Plating=Tin, Depth=0.5mm, Features="Automotive AEC-Q200", Height=0.35mm, Lead Free="Lead Free", Length=1mm, Military Standard=Not, Mount="Surface Mount", Number of Pins=2, Number of Terminations=2, Packaging="Tape and Reel", Power Rating=63mW, Radiation Hardening=No, Termination=SMD/SMT, Voltage Rating (DC)=50V, Weight=2.3E-05oz, Width=0.02inch
R6 R7: library part CMP-2002-08123-3, "RES Thick Film, 100kΩ, 1%, 0.063W, 100ppm/°C, 0402", Case Code (Imperial)=0402, Case Code (Metric)=1005, Max Operating Temperature=155°C, Max Power Dissipation=63mW, Min Operating Temperature=-55°C, Package Quantity=10000, Resistance=100kR, Temperature Coefficient=100ppm/°C, Tolerance=1%, Voltage Rating=50V, Case/Package=0402, Composition="Thick Film", Contact Plating=Tin, Depth=0.5mm, Features="Automotive AEC-Q200", Height=0.35mm, Lead Free="Lead Free", Length=1mm, Military Standard=Not, Mount="Surface Mount", Number of Pins=2, Number of Terminations=2, Packaging="Tape and Reel", Power Rating=63mW, Radiation Hardening=No, Termination=SMD/SMT, Voltage Rating (DC)=50V, Weight=2.3E-05oz, Width=0.02inch
RN2483: library part CMP-06331-000004-1, Manufacturer=Microchip, Max Frequency=870MHz, Max Supply Voltage=3.6V, Min Supply Voltage=2.1V, Temperature="-40°C to +85°C", Temperature Range High=+85°C, Temperature Range Low=-40°C, Transmitting Current=44.5mA, Automotive=No, Bandwidth=1.74MHz, Category=UNK, ComponentLink2Description=Datasheet, ComponentLink2URL=http://ww1.microchip.com/downloads/en/DeviceDoc/RN2483-Low-Power-Long-Range-LoRa-Technology-Transceiver-Module-Data-Sheet-DS50002346D.pdf, Data Rate=300kbits/s, Device Class L1="Integrated Circuits (ICs)", Device Class L2="RF Semiconductors and Devices", Device Class L3=Transceivers, Digikey Description=RN2483A-I/RM104, Height=3.467mm, Interface=I2C,SPI,UART, Lead Free=Yes, Manufacturer Part Number=RN2483A-I/RM104, Mouser Description="RF Transceiver Module FSK/GFSK/LoRa 434.79MHz/870MHz 3.3V SMD Tray", Number Of Adc Channels=13, Number Of Gpio=14, Octopart=https://octopart.com/rn2483a-i%2Frm104-microchip-90584481, Package=RN2483A-I/RM104, RoHS=TRUE, Sensitivity=-146dBm

## Free pads (board coordinates)
  round 4 hole 3.2: 3(3,3) 3(3,27.2) 4(34,40)

## Via types
v1: diameter 0.444, hole 0.254, Top Layer to Bottom Layer, 52 vias
v2: diameter 0.5, hole 0.2, Top Layer to Bottom Layer, 9 vias

## Nets (pads, with @x,y where several pads share a name; then routed paths per layer and width w, separated by ;. In a path a pad name is that pad's centre, name@x,y a point inside that pad or via, vN(x,y) a via of type N, cw(c..) or ccw(c..) an arc to the next point about the centre after c; other vN are vias at no path point)
3.3V: C1.1 C2.1 CP2103.6 P2.5 R5.2 R9.2 R10.1 RN2483.12 RN2483.34 | length 53.8
  Top Layer w0.254: P2.5 16.891,5.641 v1(16.891,7.7) RN2483.34 16.637,9.959 v1(16.637,11.991) ; v1(14.986,31.803) 15.714,31.075 17.272,31.075 ; v1(17.693,39.677) 17.947,39.423 R10.1 ; v1(18.38,21.608) 18.38,21.705 19.05,22.375 19.05,27.104 RN2483.12 19.05,27.866 19.05,28.732 v1(18.923,28.859) 18.796,28.986 R5.2 18.639,29.913 18.434,29.913 17.272,31.075 ; CP2103.6@19.812,34.405 19.322,34.405 19.133,34.216 18.248,34.216 17.272,33.24 17.272,31.075
  Bottom Layer w0.254: v1(14.986,31.803) 14.351,32.438 14.351,36.335 v1(17.693,39.677) ; R9.2 16.053,12.575 v1(16.637,11.991) ; R9.2@15.402,12.577 15.402,13.481 18.38,16.459 v1(18.38,21.608) v1@18.415,21.643 ; v1(16.891,7.7) 16.942,7.7 17.042,7.8 C2.1 ; C1.1 17.925,29.975 18.887,29.013 18.887,28.896 v1(18.923,28.859)
GND: C1.2 C2.2 C3.1 CP2103.2 CP2103.18 CP2103.19 CP2103.29 D5.2 DEBUG_0.2 DEBUG_1.2 DEBUG_2.2 DS4.2 J3.5 J4.2 J4.3 J4.4 J4.5 P2.4 R4.1 RN2483.1 RN2483.8 RN2483.9 RN2483.10 RN2483.11 RN2483.13 RN2483.14 RN2483.20 RN2483.21 RN2483.22 RN2483.24 RN2483.26 RN2483.27 RN2483.28 RN2483.33 RN2483.41 RN2483.47 | length 53.6
  Top Layer w0.254: J4.3@2.73,22.405 J4.3@2.921,22.405 ; J4.2 2.953,13.8 v1(6.25,13.8) ; J4.3 2.926,22.6 v1(6.3,22.6) ; J3.5 4.111,34.864 5.386,34.864 v1(5.4,34.85) ; C3.1 6.25,41.325 v1(7.6,41.325) ; v1(6.85,16.025) 7.971,16.025 RN2483.26 RN2483.27 ; v1(6.9,18.575) 7.981,18.575 RN2483.24 ; v1(6.9,20.8) 7.666,20.8 RN2483.22 RN2483.21 RN2483.21@7.996,22.4 ; RN2483.27@7.991,14.775 RN2483.27 ; RN2483.27@8.255,14.785 RN2483.27 ; RN2483.28 9.275,9.701 v1(9.275,8.4) ; RN2483.20 9.275,27.489 v1(9.275,29.025) ; v1(12.25,36.375) D5.2 ; v1(15.6,11.05) 15.6,9.726 RN2483.33 ; v1(16.85,28.975) 16.85,27.526 RN2483.14 RN2483.13 ; v1(18.225,2.1) 18.225,3.45 DEBUG_0.2@18.25,3.475 ; CP2103.2 21.509,36.424 v2(21.609,36.524) ; DEBUG_1.2@20.525,3.375 20.575,3.325 v1(20.575,2.05) ; v1(20.65,29) 20.65,29.962 DS4.2 ; RN2483.11@20.713,27.497 RN2483.11 ; RN2483.11@20.828,27.358 RN2483.11 ; DEBUG_2.2@22.763,3.187 22.914,3.187 22.95,3.152 v1(22.95,2.05) ; v2(23.809,35.424) CP2103.18 ; v1(24.45,28.95) 24.45,27.546 RN2483.8 RN2483.9 RN2483.10 RN2483.11 ; CP2103.19 CP2103.18 ; RN2483.41@25.4,9.324 RN2483.41 25.8,9.724 v1(25.8,10.925) ; CP2103.18@25.532,35.451 25.505,35.424 CP2103.18 ; v1(32.675,29.075) 32.675,29.024 33.02,28.679 33.02,27.866 RN2483.1 ; v1(33.4,11.1) RN2483.47 RN2483.47
  Bottom Layer w0.254: J4.4 2.953,13.8 v1(6.25,13.8) ; J4.5 2.926,22.6 v1(6.3,22.6) ; R4.1 12.45,19.525 v1(13.575,19.525) ; v1(15.575,30.275) 15.626,30.275 15.851,30.05 C1.2 ; v1@16.725,29.151 16.85,29.026 v1(16.85,28.975) ; C2.2 19.15,7.875 19.641,8.366 19.877,8.366 v1(19.913,8.402)
  other v1: 23.175,6.95 28.625,29.825 5.8,29.9 11.25,33.175 29.525,33.325 35,33.425 8.35,34.65 31.575,36.95 14.725,38.675 10.425,39.225 28.5,40.325 15.85,40.975 24.275,41.15
  other v2: 21.609,34.324 22.709,34.324 23.809,34.324 21.609,35.424 22.709,35.424 22.709,36.524 23.809,36.524
"GPIO 6": P1.4 RN2483.43 | length 3.8
  Top Layer w0.254: P1.4 27.045,6.778 27.045,7.652 27.94,8.547 27.94,9.324 RN2483.43
"GPIO 7": P1.3 RN2483.44 | length 3.3
  Top Layer w0.254: P1.3 29.337,9.451 RN2483.44
"GPIO 8": P1.2 RN2483.45 | length 3.6
  Top Layer w0.254: RN2483.45 31.242,9.324 31.242,8.293 31.849,7.686 31.849,6.558 P1.2
"GPIO 9": P1.1 RN2483.46 | length 4.1
  Top Layer w0.254: RN2483.46 32.512,9.324 32.512,8.435 P1.1
GPIO_2: CP2103.16 J1.1 | length 2.2
  Top Layer w0.254: CP2103.16 25.203,34.405 25.758,34.405 26.059,34.104 26.528,34.104 J1.1
GPIO_3: CP2103.17 J1.2 | length 1.7
  Top Layer w0.254: CP2103.17@25.654,34.913 26.261,34.913 26.929,35.581 J1.2
NetCP2103_1: CP2103.1 CP2103.26 CP2103.27 CP2103.28 R10.2 | length 4.5
  Top Layer w0.254: CP2103.1@20.193,36.951 20.193,37.137 20.674,37.618 21.182,37.618 21.209,37.645 CP2103.28 ; R10.2 20.548,39.266 20.548,38.881 21.209,38.22 CP2103.28 ; CP2103.26 CP2103.27 CP2103.28
NetCP2103_9: CP2103.9 R5.1 | length 4.2
  Top Layer w0.254: R5.1 18.798,30.66 19.734,31.596 20.911,31.596 21.69,32.375 21.69,32.93 CP2103.9
NetCP2103_12: CP2103.12 R8.2 | length 2.4
  Top Layer w0.254: CP2103.12 23.228,32.93 23.228,32.375 23.5,32.103 R8.2@23.5,30.662
NetDS0_1: DEBUG_0.1 R1.1 | length 2.3
  Top Layer w0.254: DEBUG_0.1@18.15,5.025 R1.1
NetDS1_1: DEBUG_1.1 R2.1 | length 2.8
  Top Layer w0.254: R2.1 20.35,6.1 DEBUG_1.1@20.35,5.1
NetDS2_1: DEBUG_2.1 R3.1 | length 3.3
  Top Layer w0.254: R3.1 21.025,6.9 22.727,5.198 DEBUG_2.1@23.013,4.912
NetDS4_1: DS4.1 R8.1 | length 1.1
  Top Layer w0.254: DS4.1 22.359,29.879 23.241,29.879
NetR1_2: R1.2 RN2483.35 | length 1.6
  Top Layer w0.254: R1.2 18.15,9.694 RN2483.35
NetR2_2: R2.2 RN2483.36 | length 1.7
  Top Layer w0.254: R2.2 19.05,9.324 RN2483.36
NetR3_2: R3.2 RN2483.37 | length 1.6
  Top Layer w0.254: RN2483.37 21.025,9.381 R3.2
NetR4_2: R4.2 RN2483.23 | length 3.1
  Top Layer w0.254: RN2483.23 8.366,19.5 v1(9.625,19.5)
  Bottom Layer w0.254: v1@9.633,19.492 v1(9.625,19.5) R4.2
PGC_INT: P2.2 RN2483.30 | length 4.2
  Top Layer w0.254: P2.2 11.811,8.181 RN2483.30
PGD_INT: P2.3 RN2483.31 | length 6.7
  Top Layer w0.254: P2.3 13.602,4.892 13.602,6.896 13.081,7.417 RN2483.31
RADIO_CTS: CP2103.23 RN2483.3 | length 24.4
  Top Layer w0.254: CP2103.23@23.728,38.247 23.728,38.473 24.01,38.755 26.772,38.755 34.925,30.602 34.925,26.482 34.277,25.834 31.973,25.834 31.242,26.565 31.242,27.104 RN2483.3
RADIO_RTS: CP2103.22 RN2483.2 | length 20.2
  Top Layer w0.254: CP2103.22 26.909,37.899 34.417,30.391 34.417,26.692 34.067,26.342 32.735,26.342 32.512,26.565 32.512,27.104 RN2483.2
RADIO_RX: CP2103.25 R6.1 RN2483.7 | length 37
  Top Layer w0.254: CP2103.25@22.712,38.28 22.712,39.361 R6.1 23.42,39.423 24.183,40.185 26.797,40.185 35.925,31.057 35.925,25.945 34.417,24.437 26.503,24.437 25.908,25.032 25.908,27.358 RN2483.7
RADIO_TX: CP2103.24 R7.1 RN2483.6 | length 35.1
  Top Layer w0.254: CP2103.24 23.22,37.91 23.22,38.684 23.799,39.263 26.982,39.263 35.433,30.812 35.433,26.271 34.488,25.326 31.763,25.326 31.128,25.961 27.432,25.961 v1(26.924,25.453) 26.924,27.358 RN2483.6
  Bottom Layer w0.254: R7.1 26.655,25.675 26.877,25.453 v1(26.924,25.453)
RESET: P2.6 R9.1 RN2483.32 | length 8.2
  Top Layer w0.254: v1(13.081,11.991) 14.351,10.721 14.351,8.054 14.973,7.432 14.973,6.289 P2.6
  Bottom Layer w0.254: v1@13.081,12.06 v1(13.081,11.991) 13.914,11.991 14.339,12.416 14.341,12.416 14.498,12.573 R9.1
RFL: J4.1 RN2483.25 | length 5
  Top Layer w0.254: J4.1@3.429,18.341 J4.1@4.445,17.325
  Top Layer w0.293: J4.1@4.445,17.325 RN2483.25
USB_D_N: CP2103.4 D5.4 J3.2 | length 19.2
  Top Layer w0.191: D5.4@10.493,37.325 D5.4@10.793,37.325 ; v1@15.342,34.667 v1(15.4,34.725)
  Top Layer w0.198: J3.2 9.995,36.827 D5.4@10.493,37.325 ; D5.4@10.793,37.325 11.487,36.631 11.487,35.92 11.491,35.916 11.491,35.734 12.558,34.667 v1@15.342,34.667 ; v1(15.4,34.725) 15.407,34.732 v1@15.438,34.732 ; v1(17.279,36.575) 18.43,35.424 19.718,35.424 CP2103.4
  Bottom Layer w0.191: v1(15.4,34.725) v1@15.408,34.717
  Bottom Layer w0.198: v1@15.438,34.732 v1@17.279,36.574
USB_D_P: CP2103.3 D5.5 J3.3 | length 18.6
  Top Layer w0.191: v1@15.471,33.825 v1(15.529,33.883)
  Top Layer w0.198: J3.3 8.385,36.177 9.137,35.425 D5.5 ; D5.5@10.793,35.425 12.393,33.825 v1@15.471,33.825 ; v1(18.15,36.575) 18.801,35.924 19.718,35.924 CP2103.3
  Bottom Layer w0.191: v1(15.529,33.883) 15.537,33.875 15.771,33.875
  Bottom Layer w0.198: 15.771,33.875 18.15,36.254 v1(18.15,36.575)
V_BUS: C3.2 CP2103.7 CP2103.8 D5.3 J3.1 R6.2 R7.2 | length 65.8
  Top Layer w0.254: v1(2.95,30.775) 2.95,37.094 3.264,37.408 4.028,37.408 J3.1 6.2,37.477 ; C3.2 6.2,37.477 ; v1(18.288,32.819) 20.193,32.819 ; CP2103.7 20.22,33.924 20.193,33.897 20.193,32.819 ; CP2103.8@21.182,32.891 20.9,32.891 20.828,32.819 20.193,32.819 ; R6.2 22.648,40.227 22.541,40.334 22.541,40.336 22.184,40.693 16.786,40.693 16.637,40.544 16.637,39.296 v1(17.78,38.153) 16.952,37.325 D5.3 13.083,37.325 12.357,38.051 8.257,38.051 7.683,37.477 6.2,37.477
  Bottom Layer w0.254: v1(2.95,30.775) 2.95,30.758 8.033,25.675 R7.2 ; v1(17.78,38.153) 19.025,36.908 19.025,33.556 v1(18.288,32.819)
pads on no net: CP2103.5 CP2103.10 CP2103.11 CP2103.13 CP2103.14 CP2103.15 CP2103.20 CP2103.21 D5.1 J3.4 J3.6 J3.7 J3.8 J3.9 J3.10 J3.11 P2.1 RN2483.4 RN2483.5 RN2483.15 RN2483.16 RN2483.17 RN2483.18 RN2483.19 RN2483.29 RN2483.38 RN2483.39 RN2483.40 RN2483.42

## Polygon pours and split planes (outlines as drawn)
GND on GND_1 (split plane): 34.217,42.482 34.433,42.454 34.645,42.407 34.852,42.342 35.053,42.258 35.246,42.158 35.429,42.041 35.602,41.909 35.762,41.762 35.909,41.602 36.041,41.429 36.158,41.246 36.258,41.053 36.342,40.852 36.407,40.645 36.454,40.433 36.482,40.217 36.491,40.016 36.49,40 36.49,3 36.491,2.984 36.482,2.783 36.454,2.567 36.407,2.355 36.342,2.148 36.258,1.947 36.158,1.754 36.041,1.571 35.909,1.398 35.762,1.238 35.602,1.091 35.429,0.959 35.246,0.842 35.053,0.742 34.852,0.658 34.645,0.593 34.433,0.546 34.217,0.518 34.016,0.509 34,0.51 3,0.51 2.984,0.509 2.783,0.518 2.567,0.546 2.355,0.593 2.148,0.658 1.947,0.742 1.754,0.842 1.571,0.959 1.398,1.091 1.238,1.238 1.091,1.398 0.959,1.571 0.842,1.754 0.742,1.947 0.658,2.148 0.593,2.355 0.546,2.567 0.518,2.783 0.509,2.984 0.51,3 0.51,40 0.509,40.016 0.518,40.217 0.546,40.433 0.593,40.645 0.658,40.852 0.742,41.053 0.842,41.246 0.959,41.429 1.091,41.602 1.238,41.762 1.398,41.909 1.571,42.041 1.754,42.158 1.947,42.258 2.148,42.342 2.355,42.407 2.567,42.454 2.783,42.482 2.984,42.491 3,42.49 34,42.49 34.016,42.491
no net on GND_2 (split plane): 34.217,42.482 34.433,42.454 34.645,42.407 34.852,42.342 35.053,42.258 35.246,42.158 35.429,42.041 35.602,41.909 35.762,41.762 35.909,41.602 36.041,41.429 36.158,41.246 36.258,41.053 36.342,40.852 36.407,40.645 36.454,40.433 36.482,40.217 36.491,40.016 36.49,40 36.49,3 36.491,2.984 36.482,2.783 36.454,2.567 36.407,2.355 36.342,2.148 36.258,1.947 36.158,1.754 36.041,1.571 35.909,1.398 35.762,1.238 35.602,1.091 35.429,0.959 35.246,0.842 35.053,0.742 34.852,0.658 34.645,0.593 34.433,0.546 34.217,0.518 34.016,0.509 34,0.51 3,0.51 2.984,0.509 2.783,0.518 2.567,0.546 2.355,0.593 2.148,0.658 1.947,0.742 1.754,0.842 1.571,0.959 1.398,1.091 1.238,1.238 1.091,1.398 0.959,1.571 0.842,1.754 0.742,1.947 0.658,2.148 0.593,2.355 0.546,2.567 0.518,2.783 0.509,2.984 0.51,3 0.51,40 0.509,40.016 0.518,40.217 0.546,40.433 0.593,40.645 0.658,40.852 0.742,41.053 0.842,41.246 0.959,41.429 1.091,41.602 1.238,41.762 1.398,41.909 1.571,42.041 1.754,42.158 1.947,42.258 2.148,42.342 2.355,42.407 2.567,42.454 2.783,42.482 2.984,42.491 3,42.49 34,42.49 34.016,42.491

## Other copper
Bottom Layer:
  region: 15.264,19.976 15.264,19.944 15.514,19.944 15.514,19.913 15.545,19.913 15.545,19.882 15.576,19.882 15.576,19.632 15.608,19.632 15.608,19.6 15.639,19.6 15.639,19.851 15.67,19.851 15.67,19.913 15.702,19.913 15.702,19.944 15.952,19.944 15.952,19.976 16.014,19.976 16.014,20.007 15.764,20.007 15.764,20.038 15.67,20.038 15.67,20.101 15.639,20.101 15.639,20.351 15.576,20.351 15.576,20.069 15.545,20.069 15.545,20.038 15.483,20.038 15.483,20.007 15.201,20.007 15.201,19.976 15.232,19.976
  region: 31.778,22.978 31.809,22.978 31.809,23.197 31.996,23.197 31.996,23.228 32.278,23.228 32.278,23.26 32.247,23.26 32.247,23.291 31.965,23.291 31.965,23.322 31.809,23.322 31.809,23.541 31.778,23.541 31.778,23.791 31.746,23.791 31.746,23.729 31.715,23.729 31.715,23.447 31.684,23.447 31.684,23.322 31.527,23.322 31.527,23.291 31.246,23.291 31.246,23.228 31.496,23.228 31.496,23.197 31.684,23.197 31.684,23.072 31.715,23.072 31.715,22.79 31.746,22.79 31.746,22.697 31.778,22.697 31.778,22.947
  region: 27.336,21.758 27.211,21.758 27.211,21.727 27.086,21.727 27.086,21.696 27.305,21.696 27.305,21.665 27.336,21.665 27.336,21.508 27.368,21.508 27.368,21.477 27.399,21.477 27.399,21.665 27.43,21.665 27.43,21.696 27.649,21.696 27.649,21.727 27.524,21.727 27.524,21.758 27.399,21.758 27.399,21.946 27.368,21.946 27.368,21.915 27.336,21.915 27.336,21.79
  region: 19.83,23.823 20.049,23.823 20.049,23.854 20.174,23.854 20.174,23.885 19.955,23.885 19.955,23.916 19.799,23.916 19.799,24.01 19.767,24.01 19.767,24.292 19.736,24.292 19.736,24.229 19.705,24.229 19.705,23.979 19.674,23.979 19.674,23.916 19.517,23.916 19.517,23.885 19.298,23.885 19.298,23.854 19.455,23.854 19.455,23.823 19.674,23.823 19.674,23.76 19.705,23.76 19.705,23.51 19.736,23.51 19.736,23.447 19.767,23.447 19.767,23.697 19.799,23.697 19.799,23.823
Multi-Layer:
  the board outline again, w0.254

## Silkscreen, mask and mechanical layers (free items; w line width, h text height)
Top Overlay:
  lines w0.254: 24.65,3.2 35.825,3.2
  text "Ground Station" at 25.079,3.879 h0.8
  text "Matteo Golin" at 25.129,1.604 h0.8
Bottom Overlay:
  drawing of 10 lines, arcs and shapes, not listed
  text "Ground Station 2023" at 35.246,3.804 h1
  text "Edited By: Roland Neill" at 35.321,1.512 h1

## Text inside footprints (layer, text, board x,y; h text height)
J3: Mechanical 1 "PCB EDGE" at -0.153,43.377 h0.3 r270